# Altium PCB Export_PCB.PcbDoc (part 5 of 7)
Units mm, origin at the board's own origin, x right, y up, seen from the top; angles counter-clockwise.
Board outline 93 x 90 mm, 6 copper layers (Top_1, GND_2, SIGNAL_3, PWR_4, GND_5, Bottom_6), stack 1.606 mm thick; 470 components, 374 nets, 2145 pads, 1031 vias.
Unrouted connection lines stored in the file: 451.
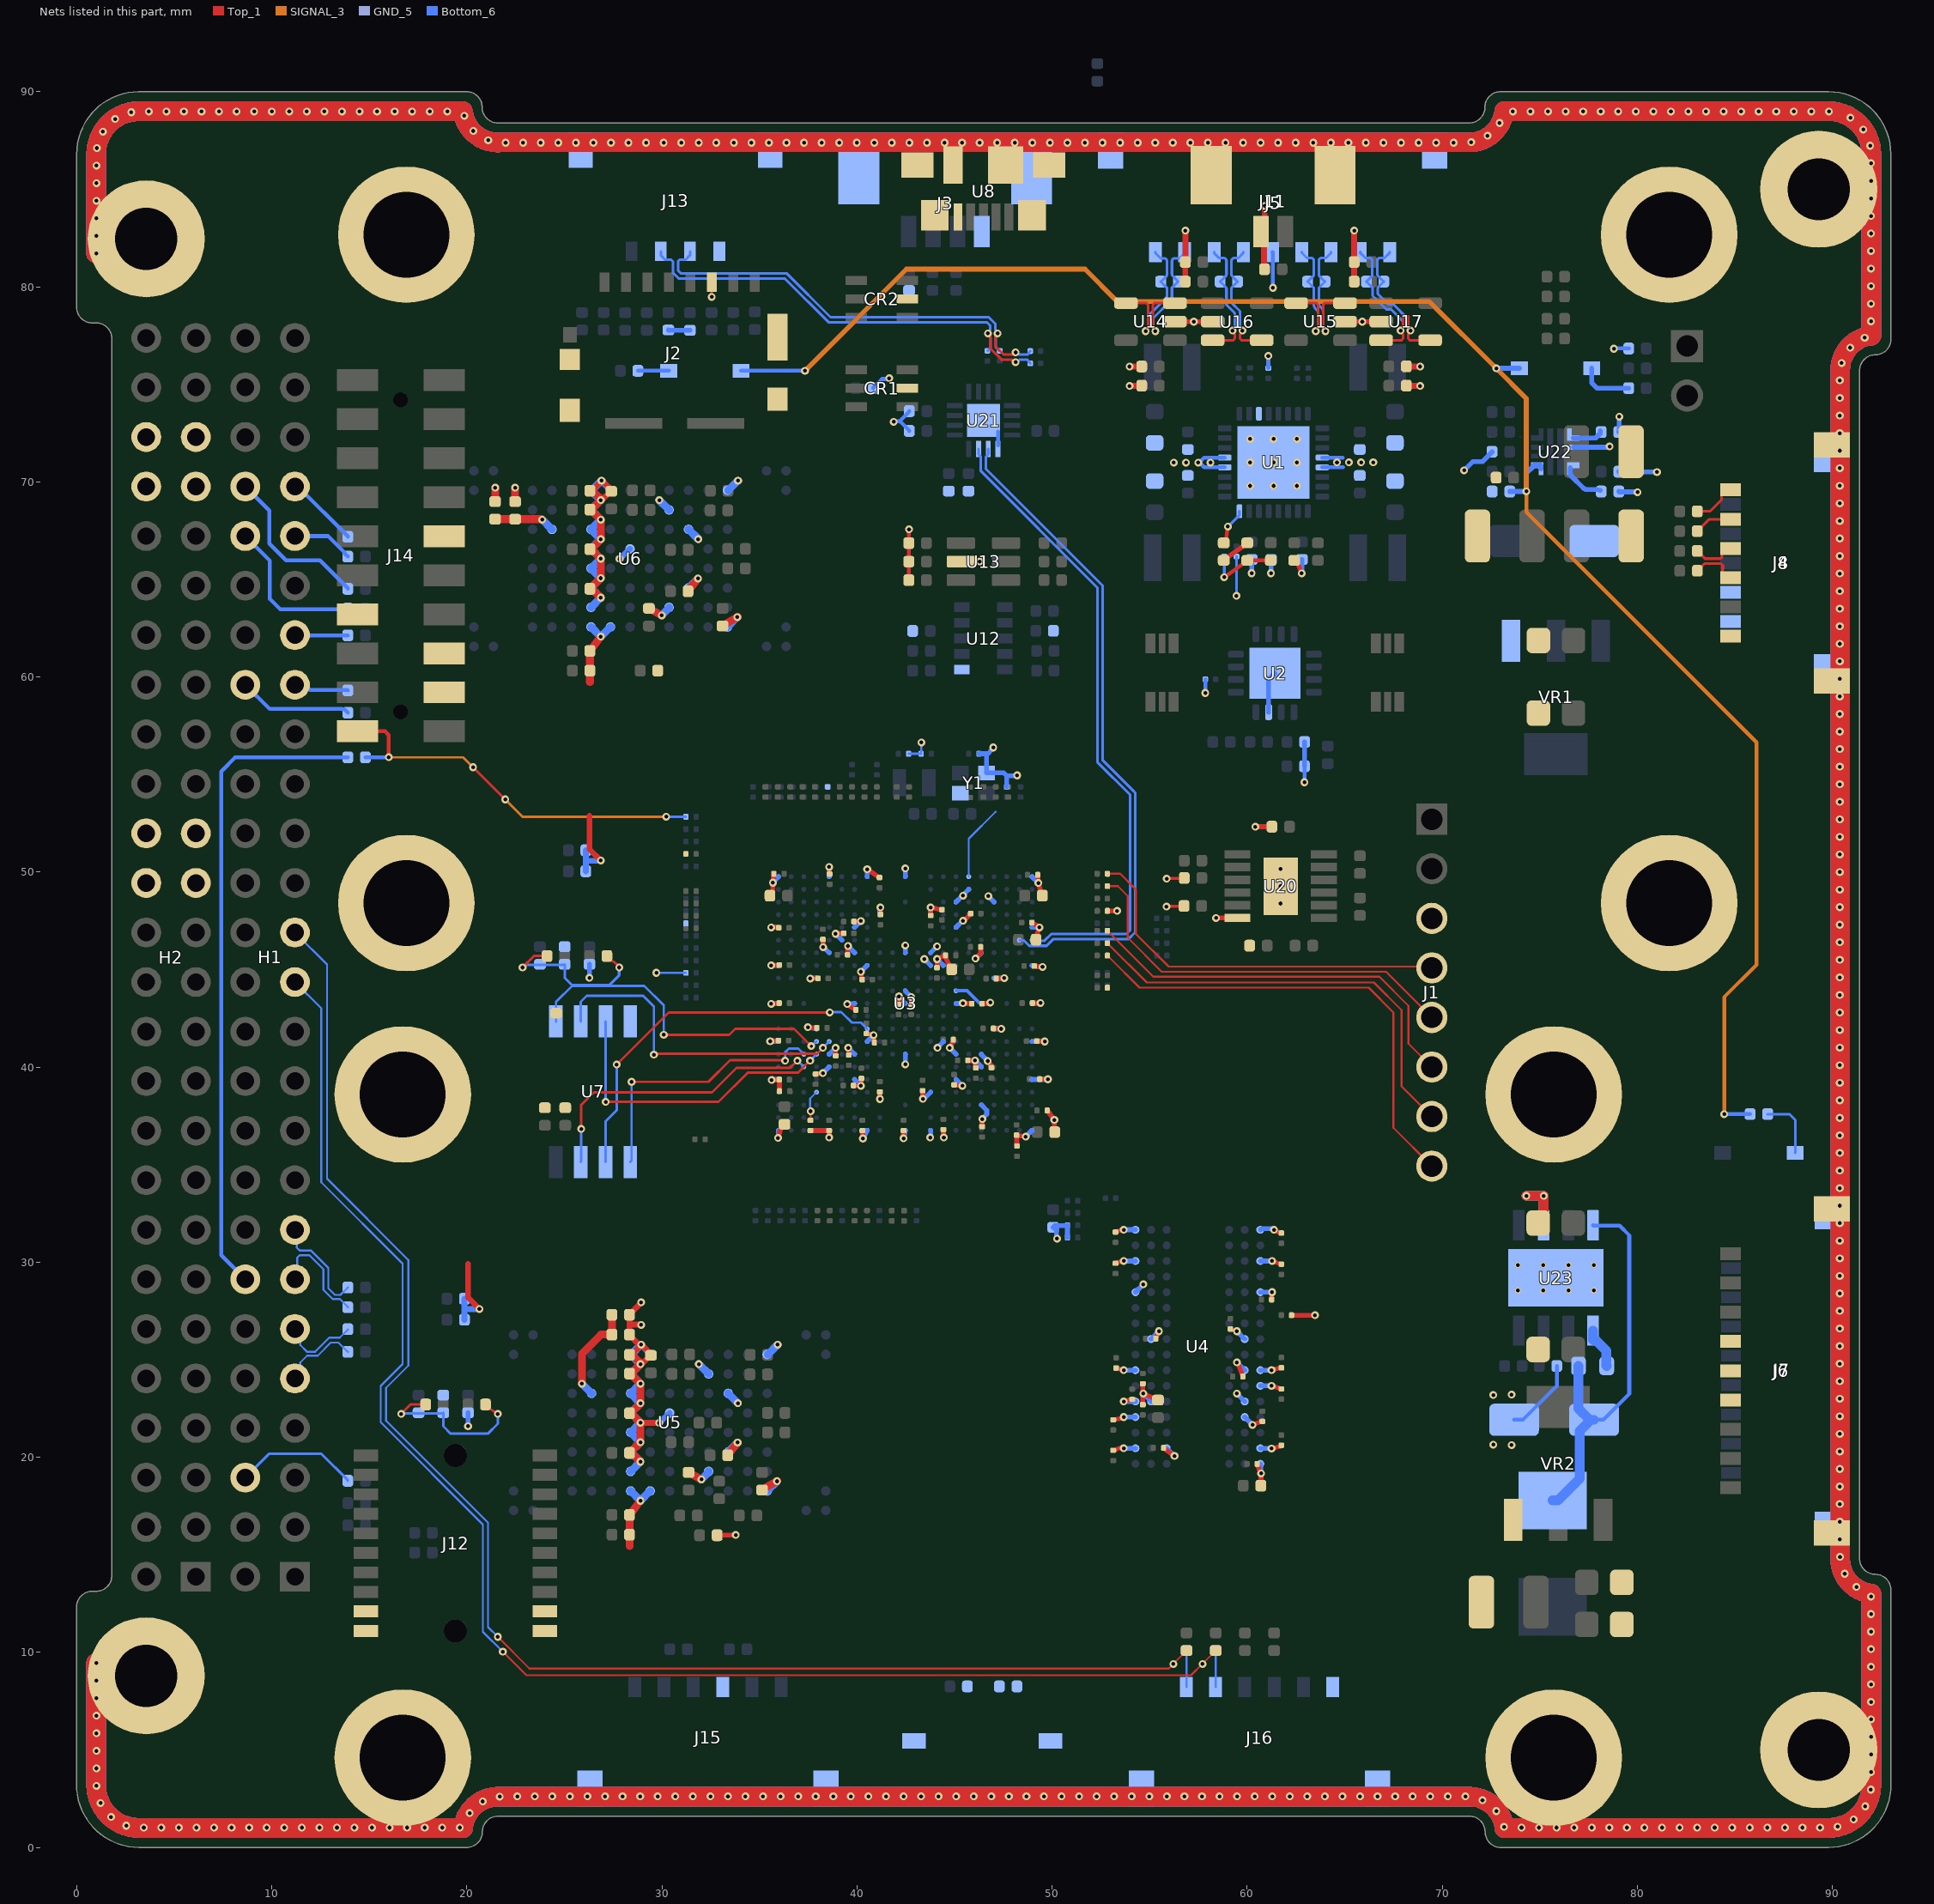
[diagram p7: the nets of this part, all layers, seen from the top]

## Via types
v1: diameter 0.4, hole 0.2, Top_1 to Bottom_6, 870 vias
v2: diameter 0.4, hole 0.2, Top_1 to Bottom_6, tented both sides, 160 vias
v3: diameter 0.4, hole 0.15, Top_1 to Bottom_6, 1 vias

## Nets (pads, with @x,y where several pads share a name; then routed paths per layer and width w, separated by ;. In a path a pad name is that pad's centre, name@x,y a point inside that pad or via, vN(x,y) a via of type N, cw(c..) or ccw(c..) an arc to the next point about the centre after c; other vN are vias at no path point) (continued)
GND: BT1.1 C1.1 C2.2 C3.1 C4.1 C5.2 C6.1 C7.1 C10.1 C11.2 C12.1 C13.2 C14.1 C15.1 C16.1 C17.1 C18.1 C19.1 C20.1 C21.1 C22.1 C23.1 C24.1 C25.1 C26.1 C27.1 C28.1 C29.2 C30.1 C31.1 C32.1 C33.1 C34.1 C35.1 C36.1 C37.1 C38.1 C39.1 C40.1 C41.1 C42.1 C43.1 C44.1 C45.1 C46.1 C47.1 C48.1 C49.1 C50.1 C51.1 C52.1 C53.1 C54.1 C55.1 C56.1 C57.1 C58.1 C59.1 C60.2 C61.2 C62.2 C63.2 C64.2 C65.2 C66.2 C67.2 C68.2 C69.2 C70.2 C71.2 C72.2 C73.2 C74.2 C75.2 C76.2 C77.2 C78.2 C79.2 C80.2 C81.2 C82.2 C83.2 C84.2 C85.1 C86.1 C87.1 C88.1 C89.1 C90.1 C91.1 C92.1 C93.1 C94.1 C95.1 C96.1 C97.1 C98.1 C99.1 C100.1 C102.1 C103.1 C104.2 C105.2 C106.1 C107.1 C108.1 C109.1 C110.1 C111.1 C112.1 C113.1 C114.1 C115.1 C116.1 C117.1 C118.1 C119.1 C120.1 C121.1 C122.1 C123.1 C124.1 C125.1 C126.1 C127.1 C128.1 C129.1 C130.1 C131.1 C132.1 C133.1 C134.1 C135.1 C136.1 C143.1 C144.1 C145.1 C146.1 C147.1 C148.1 C149.1 C150.1 C151.1 C153.1 C154.1 C155.1 C156.1 C158.1 C159.1 C160.1 C161.1 C162.1 C163.1 C164.1 C165.1 C166.1 C167.1 C168.1 C169.1 C170.1 C173.1 C174.1 C175.1 C176.2 C177.1 C178.1 C179.1 C180.1 C181.1 C182.1 c.1 CR1.2 CR2.2 D5.2 D7.2 H2.29 H2.30 H2.31 H2.32 H2.47 H2.48 H3.1 H4.1 H5.1 H6.1 H7.1 H8.1 H9.1 H10.1 Hole1.1 Hole2.1 Hole3.1 Hole4.1 J1.3 J2.G1 J2.G2 J2.G3 J2.G4 J2.P6 J3.4 J3.M1 J3.M2 J4.4 J4.5 J4.6 J5.2 J5.M1 J5.M2 J6.4 J6.5 J6.6 J6.M1 J6.M2 J7.M1 J7.M2 J8.1 J8.7 J11.5 J11.M1 J11.M2 J12.01 J12.02 J12.19 J12.20 J13.4 J13.M1 J13.M2 J14.10 J14.13 J14.16 J14.18 J15.3 J15.7 J16.1 J16.7 R11.2 R13.1 R20.2 R22.1 R23.1 R24.1 R25.1 R26.1 R27.2 R124.2 R128.2 R130.1 R131.1 R170.2 R171.2 R181.2 R187.2 R193.2 R196.1 R198.1 R199.1 R204.2 R205.2 R207.2 R208.2 R211.2 U1.3 U1.12 U1.13 U1.28 U1.29 U1.33 U2.3 U2.17 U3.A1 U3.A11 U3.A14 U3.A17 U3.A21 U3.AA1 U3.AA8 U3.AA9 U3.AA11 U3.AA14 U3.AA17 U3.AA21 U3.B6 U3.C4 U3.C7 U3.D9 U3.D13 U3.E1 U3.E7 U3.E15 U3.E21 U3.F16 U3.G5 U3.G9 U3.G11 U3.G15 U3.G17 U3.H1 U3.H8 U3.H9 U3.H14 U3.H21 U3.J4 U3.J18 U3.K11 U3.L1 U3.L7 U3.L11 U3.L15 U3.L21 U3.N4 U3.N18 U3.P1 U3.P8 U3.P14 U3.P21 U3.R5 U3.R7 U3.R11 U3.R15 U3.R17 U3.T5 U3.T17 U3.U1 U3.U7 U3.U15 U3.U21 U3.V9 U3.V13 U3.W5 U4.A9 U4.B1 U4.B3 U4.B9 U4.D1 U4.D8 U4.E1 U4.E2 U4.E8 U4.F9 U4.G1 U4.G8 U4.G9 U4.J2 U4.J8 U4.M1 U4.M9 U4.P1 U4.P9 U4.T1 U4.T9 U5.G2@28.4,25.273 U5.G3@28.4,24.273 U5.G4@28.4,23.273 U5.G5@28.4,22.273 U5.G6@28.4,21.273 U5.G7@28.4,20.273 U5.G8@28.4,19.273 U5.G9@28.4,18.273 U5.H2@29.4,25.273 U5.H9@29.4,18.273 U5.J5@30.4,22.273 U5.L3@32.4,24.273 U5.L8@32.4,19.273 U5.M4@33.4,23.273 U5.M7@33.4,20.273 U5.P2@35.4,25.273 U5.P9@35.4,18.273 U6.G2@26.368,69.564 U6.G3@26.368,68.564 U6.G4@26.368,67.564 U6.G5@26.368,66.564 U6.G6@26.368,65.564 U6.G7@26.368,64.564 U6.G8@26.368,63.564 U6.G9@26.368,62.564 U6.H2@27.368,69.564 U6.H9@27.368,62.564 U6.J5@28.368,66.564 U6.L3@30.368,68.564 U6.L8@30.368,63.564 U6.M4@31.368,67.564 U6.M7@31.368,64.564 U6.P2@33.368,69.564 U6.P9@33.368,62.564 U7.4 U8.5 U8.6 U8.7 U8.8 U8.9 U8.10 U8.11 U12.6 U13.2 U14.2 U15.2 U16.2 U17.2 U20.6 U20.13 U21.1 U21.17 U22.8 U23.6 U23.9 VR1.1 VR2.1 Y1.2 Y1.4 | length 1089.2
  Top_1 w0.125: v1(32.557,79.478) J2.P6@32.557,80.226
  Top_1 w0.15: v1(55.868,48.223) 55.886,48.241 56.749,48.241 C161.1@56.767,48.259 ; v1(55.88,49.657) 55.898,49.675 56.761,49.675 R196.1@56.779,49.692
  Top_1 w0.2: R170.2@42.661,64.958 42.667,64.963 42.667,67.559 v1(42.672,67.564) ; U13.2@45.327,65.913 45.328,65.914 v1(46.298,65.916) v1(46.298,65.916)
  Top_1 w0.25: C107.1@32.835,16.002 32.842,16.009 33.779,16.009 v1(33.786,16.017) ; C18.1@35.543,48.789 35.68,48.952 v1(35.693,49.453) C23.1@35.743,49.909 ; v1(35.554,41.324) 35.595,41.324 35.628,41.358 C51.1@35.976,41.358 ; v1(35.603,43.239) 35.626,43.262 C49.1@35.99,43.262 ; v1(35.603,45.212) 35.623,45.232 C42.1@36.018,45.233 ; v1(35.603,47.162) 35.968,47.162 C21.1@35.99,47.162 ; v1(35.959,36.367) 36.126,36.931 C40.1@36.288,37.068 ; C32.1@36.015,39.362 36.003,39.35 35.637,39.35 v1(35.625,39.338) 35.634,39.347 36.017,39.347 36.026,39.338 C28.1@36.026,38.766 ; v1@37.501,42.052 C27.1@37.931,41.999 ; v1@37.614,44.548 C25.1@38.002,44.548 ; R27.2@37.615,36.745 C45.1@38.574,36.745 ; C37.1@37.885,39.642 v1@38.239,39.697 ; v1@38.256,46.159 C22.1@38.256,46.545 ; v1(38.578,36.387) 38.576,36.389 38.576,36.74 C45.1@38.578,36.742 ; v1(38.578,50.262) 38.592,50.248 38.592,49.908 C44.1@38.606,49.895 C44.1@38.606,49.895 ; C58.1@38.903,40.589 v1(38.903,40.987) ; v1(38.903,46.837) 38.924,46.858 C36.1@39.318,46.858 ; v1(39.503,43.236) 39.515,43.19 R23.1@39.94,42.937 ; C20.1@39.518,45.758 39.518,46.184 v1(39.542,46.207) ; v1(39.553,40.987) cw(c39.331,40.872) 39.581,40.872 C30.1@39.581,40.62 ; C31.1@39.818,39.058 39.828,39.048 40.192,39.048 v1(40.203,39.037) 40.217,39.051 40.217,39.408 40.229,39.42 R24.1@40.231,39.42 ; C19.1@39.843,47.458 39.843,47.46 39.856,47.472 40.188,47.472 v1(40.203,47.487) ; v1(40.203,44.887) C33.1@40.265,44.487 ; C53.1@40.278,36.745 C53.1@40.278,36.745 40.293,36.733 40.293,36.356 v1(40.307,36.342) ; C26.1@40.486,41.713 40.838,41.658 v1(40.853,41.637) 40.838,41.616 C94.1@40.894,41.259 ; v1(40.528,50.142) 41.131,49.733 R26.1@41.156,49.72 ; v1(41.178,38.363) 41.176,38.365 41.176,38.723 C47.1@41.178,38.725 ; C41.1@41.206,47.82 v1@41.206,48.184 ; C92.1@42.153,43.199 42.142,43.21 42.142,43.613 v1(42.154,43.625) ; v1@42.388,36.352 C56.1@42.389,36.745 ; C95.1@42.775,43.228 42.778,43.231 42.778,43.596 v1(42.775,43.599) ; C87.1@43.363,38.795 43.374,38.784 43.374,38.385 v1(43.385,38.374) ; C46.1@43.778,47.799 v1(43.778,48.187) C59.1@44.302,48.069 ; v1(44.103,45.537) 44.468,45.712 44.49,45.672 C50.1@44.856,45.008 ; C39.1@44.106,45.095 v1@44.106,45.534 ; C90.1@44.431,36.795 44.431,36.41 v1(44.454,36.387) ; v1(44.753,40.987) 44.955,41.368 C96.1@44.943,41.408 ; C86.1@44.981,39.092 v1@45.39,39.028 ; v1(45.434,43.274) 45.446,43.263 R20.2@45.875,43.263 ; v1(45.435,47.504) 45.464,47.533 45.508,47.533 45.819,47.843 45.819,47.856 C54.1@45.831,47.868 ; C98.1@45.697,40.337 v1(46.053,40.337) C85.1@46.103,39.949 ; v1(46.075,45.568) 46.343,45.836 C38.1@46.343,46.158 ; C91.1@46.414,36.947 v1@46.414,37.32 ; v1@46.709,40.311 46.709,40.264 46.873,40.1 46.873,39.983 46.885,39.97 C88.1@46.898,39.97 ; C93.1@47.015,41.962 47.025,41.972 47.39,41.972 v1(47.401,41.961) ; C57.1@47.143,44.533 47.145,44.534 47.525,44.534 v1(47.553,44.562) ; R128.2@48.196,35.964 C89.1@48.196,36.504 ; C89.1@48.228,36.5 v1(48.654,36.437) ; C55.1@48.968,47.408 49.34,47.205 v1(49.353,47.162) 49.158,46.578 C52.1@49.181,46.533 ; C43.1@48.996,43.285 v1(49.413,43.285) ; C35.1@49.093,45.183 49.093,45.17 49.106,45.158 49.489,45.158 v1(49.514,45.132) ; C99.1@49.24,41.312 v1(49.628,41.312) ; C34.1@49.259,49.845 49.261,49.833 49.307,49.534 cw(c49.06,49.496) v1(49.303,49.437) 49.478,48.787 49.481,48.784 C24.1@49.481,48.783 ; C97.1@49.368,39.383 49.371,39.38 49.786,39.38 v1(49.788,39.378) ; C81.2@49.751,37.776 49.82,37.695 v1(50.121,37.291) 50.121,36.833 C100.1@50.136,36.671 ; C29.2@52.84,48.006 v1(53.34,48.006) ; C67.2@53.139,20.357 53.582,20.509 v1(53.678,20.462) ; C68.2@53.139,21.922 53.632,21.999 v1(53.678,22.062) ; C75.2@53.256,29.945 53.281,29.954 53.563,30.051 cw(c53.644,29.814) v1(53.678,30.062) ; C74.2@53.256,31.545 53.281,31.554 53.563,31.651 cw(c53.644,31.414) v1(53.678,31.662) ; C104.2@53.287,24.572 v1(53.678,24.462) ; v1(53.678,22.862) 53.712,22.845 C77.2@54.099,22.978 ; C72.2@54.647,22.704 54.647,23.19 54.678,23.221 v1(54.678,23.262) ; C66.2@54.654,23.768 54.654,23.286 v1(54.678,23.262) ; C76.2@55.318,26.083 55.331,26.108 v1(55.478,26.462) ; C64.2@55.431,22.933 55.438,22.933 55.443,22.938 v1(54.678,23.262) ; C79.2@55.74,20.462 v1(56.278,20.062) ; U14.2@56.302,78.211 v1(57.27,78.211) U16.2@58.237,78.211 ; v1(58.411,47.643) 58.414,47.647 59.502,47.647 U20.6@59.506,47.65 ; C3.1@58.801,65.971 58.963,66.109 59.845,66.734 R124.2@60.008,66.871 ; C80.2@59.153,26.581 v1(59.478,26.462) ; v1(59.478,24.862) 59.525,24.84 C69.2@59.784,24.139 ; v1@60.278,21.662 60.702,21.834 C78.2@60.784,21.838 ; v1@60.42,52.323 C162.1@61.272,52.324 ; C73.2@60.518,19.658 60.546,19.577 60.67,19.216 v1(60.715,19.173) v1(60.715,19.173) 60.71,19.169 60.71,18.61 C84.2@60.706,18.606 ; v1(61.251,20.449) 61.675,20.545 C82.2@61.756,20.614 ; v1(61.251,23.662) 61.731,23.519 C70.2@61.756,23.507 ; v1(61.251,24.462) 61.261,24.477 61.271,24.487 61.736,24.585 C83.2@61.761,24.59 ; C105.2@61.255,28.083 61.255,28.108 61.255,28.358 cw(c61.505,28.358) v1@61.278,28.461 ; v1@61.279,30.059 61.731,29.904 C71.2@61.756,29.895 ; v1(61.378,31.662) ccw(c61.568,31.824) 61.488,31.587 61.731,31.504 C65.2@61.756,31.495 ; R131.1@62.281,27.283 62.35,27.281 v1(63.477,27.281) ; R13.1@62.42,65.971 62.583,65.834 v1@62.8,65.313 ; U15.2@64.938,78.211 v1(65.906,78.211) U17.2@66.873,78.211
  Top_1 w0.3: 20.066,29.902 20.066,28.182 v1(20.647,27.601) ; 26.289,52.889 26.289,51.169 v1(26.87,50.588) ; C125.1@26.431,69.564 26.906,70.039 v2(26.906,70.064) 26.931,70.064 27.406,69.589 27.406,69.539 26.95,69.083 26.887,69.083 v2(26.868,69.064) ; C114.1@28.463,25.273 28.938,25.748 v2(28.938,25.773) ; v2(28.9,21.773) 28.906,21.767 29.857,21.767 v2(29.863,21.761) ; v2(28.9,24.773) 28.919,24.792 28.982,24.792 29.438,25.248 29.438,25.298 28.963,25.773 v2(28.938,25.773) ; v2(28.938,26.789) 28.93,26.797 28.341,26.797 ; v2(28.938,27.94) 28.938,27.927 28.341,27.33 C116.1@28.341,27.305 28.341,26.797 ; v1(53.975,74.912) 53.984,74.921 54.588,74.921 C133.1@54.597,74.93 ; v1(53.975,75.909) C147.1@54.597,75.909 ; C151.1@56.833,80.237 C148.1@56.833,81.263 ; C148.1@56.835,81.265 v1@56.835,82.876 ; C176.2@60.891,80.899 60.865,80.925 60.865,82.668 J5.2@60.708,82.825 60.901,83.018 v1@60.901,84.14 ; C153.1@65.487,80.237 C150.1@65.487,81.263 ; C150.1@65.488,81.265 v1@65.488,82.876 ; C146.1@68.248,74.93 68.257,74.921 68.861,74.921 v1(68.87,74.912) ; C149.1@68.248,75.909 v1(68.87,75.909) ; 28.341,26.797 C117.1@28.341,26.289 28.341,26.264 28.813,25.792 28.919,25.792 v2(28.938,25.773)
  Top_1 w0.4: C129.1@21.456,69.198 v2(21.456,69.699) ; C128.1@22.481,69.198 v2(22.481,69.699) ; 26.312,59.741 C121.1@26.312,61.337 26.387,61.437 v2(26.868,62.064) ; C125.1@26.406,69.564 26.431,69.564 26.821,69.174 26.821,69.111 v2(26.868,69.064) 26.368,68.564 v2(26.868,68.064) v2(26.868,67.064) 26.868,67.039 26.393,66.564 26.368,66.564 v2(26.868,66.064) v2(26.868,65.064) 26.368,64.564 v2(26.868,64.064) ; 28.344,15.45 C110.1@28.344,17.046 28.419,17.146 v2(28.9,17.773) ; C114.1@28.438,25.273 28.463,25.273 28.853,24.883 28.853,24.82 v2(28.9,24.773) 28.4,24.273 v2(28.9,23.773) v2(28.9,22.773) 28.9,22.748 28.425,22.273 28.4,22.273 v2(28.9,21.773) v2(28.9,20.773) 28.4,20.273 v2(28.9,19.773) ; C124.1@29.337,63.514 v2(29.994,63.152) ; C122.1@31.342,64.393 31.417,64.493 v2(31.849,65.046) ; C115.1@31.369,19.223 v2(32.026,18.861) ; C181.1@33.106,62.614 33.206,62.689 v2(33.868,63.064) v2@33.881,63.077 ; C182.1@33.374,20.102 33.449,20.202 v2(33.881,20.755) ; C109.1@35.138,18.323 35.238,18.398 v2(35.9,18.773) v2@35.913,18.786
  Top_1 w0.5: v1(74.316,33.401) v1(75.205,33.401) 75.205,32.29 C173.1@74.919,32.004
  Top_1 w1: v1@1,3.2 ccw(c3.2,3.2) 3.2,1 19.811,1 cw(c21.6,0.8) v1@21.561,2.6 ; v1@1,3.213 Hole1.1@1,9.453 ; Hole2.1@1,81.709 1,86.8 cw(c3.2,86.8) 3.163,89 ; 3.175,89 19.8,89 ccw(c21.589,89.2) 21.561,87.4 ; v1@21.59,2.6 50.975,2.6 71.399,2.6 ; 21.59,87.399 42.015,87.4 v1@71.399,87.4 ; 71.429,2.6 cw(c71.4,0.8) 73.189,1 89.8,1 ccw(c89.8,3.2) 92,3.2 92,13.011 cw(c92.2,14.8) v1@90.4,14.795 ; v1@71.429,87.4 ccw(c71.389,89.2) 73.178,89 v1@89.789,89 ; v1@89.815,89 cw(c89.8,86.8) 92,86.806 92,77.496 ccw(c92.2,75.707) 90.4,75.707 ; v1@90.4,14.8 90.4,75.702
  GND_5 w1: v1@1,3.2 ccw(c3.2,3.2) 3.2,1 19.811,1 cw(c21.6,0.8) v1@21.561,2.6 ; v1@1,3.213 v1@1,9.453 ; v1@1,81.709 1,86.8 cw(c3.2,86.8) 3.163,89 ; 3.175,89 19.8,89 ccw(c21.589,89.2) 21.561,87.4 ; v1@21.59,2.6 50.975,2.6 71.399,2.6 ; 21.59,87.399 42.015,87.4 v1@71.399,87.4 ; 71.429,2.6 cw(c71.4,0.8) 73.189,1 89.8,1 ccw(c89.8,3.2) 92,3.2 92,13.011 cw(c92.2,14.8) v1@90.4,14.795 ; v1@71.429,87.4 ccw(c71.389,89.2) 73.178,89 v1@89.789,89 ; v1@89.815,89 cw(c89.8,86.8) 92,86.806 92,77.496 ccw(c92.2,75.707) 90.4,75.707 ; v1@90.4,14.8 90.4,75.702
  Bottom_6 w0.127: C62.2@42.651,56.062 C63.2@43.288,56.062 43.298,56.071 43.298,56.633 v1(43.307,56.642)
  Bottom_6 w0.2: C131.1@40.836,74.803 40.836,74.824 41.285,75.273 41.618,75.273 v1(41.656,75.311) ; v1(41.885,73.076) 41.923,73.114 42.197,73.114 ; R199.1@42.682,72.609 42.682,72.629 42.197,73.114 ; R198.1@42.682,73.625 42.682,73.6 42.197,73.114 ; U21.1@47.235,71.87 U21.17@47.235,72.577 ; v2(57.496,70.99) v2@57.55,70.99 ; v1(57.86,59.177) v1(57.86,59.177) R11.2@57.862,59.88 R11.2@57.862,59.88 ; U1.28@58.856,70.743 57.796,70.743 v2@57.55,70.99 ; U1.29@58.856,71.243 57.803,71.243 v2@57.55,70.99 ; C14.1@61.087,75.827 v1(61.087,76.454) ; J11.5@61.306,81.78 61.321,81.765 v1(61.321,79.945) ; v1(62.939,54.603) C7.1@62.939,55.423 ; U1.13@63.856,70.743 64.915,70.743 ; U1.12@63.856,71.243 64.908,71.243 ; D7.2@73.686,21.92 74.136,21.92 75.874,23.657 R211.2@75.874,24.681 ; v1(78.801,76.821) 78.815,76.835 R208.2@79.56,76.835 R208.2@79.574,76.849
  Bottom_6 w0.25: v1(20.066,21.59) R181.2@20.066,22.283 ; v1(26.289,44.577) R187.2@26.289,45.27 ; C130.1@30.335,77.782 30.342,77.775 31.435,77.775 C132.1@31.442,77.768 ; v1@35.566,41.312 U3.P21@35.978,41.312 ; v1(35.603,43.239) 35.626,43.262 U3.L21@35.978,43.262 ; v1(35.603,45.212) U3.H21@35.978,45.212 ; v1(35.603,47.162) U3.E21@35.978,47.162 ; v1(35.625,39.338) 35.649,39.362 U3.U21@35.978,39.362 ; v1(35.693,49.453) 35.693,49.477 U3.A21@35.978,49.762 ; v1(35.959,36.367) 35.969,36.376 35.969,36.753 U3.AA21@35.978,36.762 ; v1(37.488,42.042) U3.N18@37.928,41.962 ; v1(37.603,44.537) 37.628,44.562 U3.J18@37.928,44.562 ; v1(38.253,39.687) U3.T17@38.578,40.012 ; v1(38.266,46.149) 38.291,46.149 U3.G17@38.578,45.862 ; v1(38.578,36.387) U3.AA17@38.578,36.762 ; U3.R17@38.578,40.662 v1(38.903,40.987) ; U3.A17@38.578,49.762 v1(38.578,50.262) ; v1(38.903,46.837) U3.F16@39.228,46.512 ; v1(39.503,43.236) 39.516,43.249 39.865,43.249 U3.L15@39.878,43.262 ; v1(39.542,46.207) 39.542,46.203 39.878,45.867 U3.G15@39.878,45.862 ; v1(39.553,40.987) U3.R15@39.878,40.662 ; U3.U15@39.878,39.362 v1(40.203,39.037) ; U3.E15@39.878,47.162 v1(40.203,47.487) ; v1(40.203,44.887) U3.H14@40.528,45.212 ; v1(40.307,36.342) U3.AA14@40.528,36.762 ; U3.P14@40.528,41.312 v1(40.853,41.637) ; U3.A14@40.528,49.762 v1(40.528,50.142) ; v1(41.178,38.363) U3.V13@41.178,38.712 ; U3.D13@41.178,47.812 41.178,48.161 v1(41.203,48.186) ; v1(42.154,43.625) 42.154,43.584 v1@42.229,43.509 ; v1@42.229,43.508 U3.L11@42.475,43.262 ; v1@42.405,36.347 U3.AA11@42.478,36.762 ; v1(42.478,40.137) U3.R11@42.478,40.662 ; U3.K11@42.478,43.912 42.478,43.904 42.775,43.607 v1(42.775,43.599) ; U3.G11@42.478,45.862 v1(42.478,46.237) ; U3.A11@42.478,49.762 v1(42.478,50.187) ; v1(43.385,38.374) 43.425,38.374 43.5,38.449 43.515,38.449 U3.V9@43.778,38.712 ; v1(43.453,45.537) U3.H9@43.778,45.212 ; v1(43.752,36.387) 43.778,36.413 U3.AA9@43.778,36.762 ; U3.G9@43.778,45.862 v1(44.103,46.187) ; U3.D9@43.778,47.812 v1(43.778,48.187) ; v1(44.103,45.537) U3.H8@44.428,45.212 ; v1(44.129,40.99) 44.129,41.001 44.428,41.3 U3.P8@44.428,41.312 ; U3.AA8@44.428,36.762 44.428,36.413 v1(44.454,36.387) ; v1(44.753,40.987) U3.R7@45.078,40.662 ; U3.U7@45.078,39.362 v1(45.403,39.037) ; U3.L7@45.078,43.262 45.421,43.262 v1(45.434,43.274) ; U3.E7@45.078,47.162 45.42,47.504 v1(45.435,47.504) ; U3.C7@45.078,48.462 v1@45.403,48.787 ; v1(45.435,48.787) v1@45.403,48.787 ; U3.B6@45.728,49.112 v1@45.403,48.787 ; v1(46.053,40.337) U3.T5@46.378,40.012 ; v1(46.075,45.568) 46.084,45.568 U3.G5@46.378,45.862 ; C61.2@46.259,56.068 46.71,56.068 ; U3.W5@46.378,38.062 46.652,37.788 46.652,37.581 46.429,37.359 v1(46.429,37.336) ; U3.R5@46.378,40.662 46.378,40.649 46.703,40.324 v1(46.703,40.311) ; v1(46.736,48.768) 46.736,48.754 U3.C4@47.028,48.462 ; v1(46.987,56.385) 46.987,56.344 46.648,56.005 Y1.4@46.648,55.082 47.53,55.082 47.676,54.935 ; U3.N4@47.028,41.962 v1(47.401,41.961) ; U3.J4@47.028,44.562 v1(47.553,44.562) ; C60.2@47.676,54.364 47.676,54.935 ; v1(48.212,54.955) 48.191,54.935 47.676,54.935 ; v1(48.654,36.437) U3.AA1@48.978,36.762 ; U3.U1@48.978,39.362 49.773,39.362 v1(49.788,39.378) ; U3.P1@48.978,41.312 v1(49.628,41.312) ; U3.L1@48.978,43.262 48.99,43.274 49.401,43.274 v1(49.413,43.285) ; U3.H1@48.978,45.212 v1(49.514,45.132) ; U3.E1@48.978,47.162 v1(49.353,47.162) ; U3.A1@48.978,49.762 v1(49.303,49.437) ; v1(50.258,31.211) 50.258,31.251 50.226,31.283 50.226,31.64 50.077,31.789 C102.1@50.059,31.789 50.14,31.87 50.777,31.87 R130.1@50.789,31.882 ; C103.1@50.789,31.265 R130.1@50.789,31.882 ; R130.1@50.789,31.895 R130.1@50.789,31.882 ; v1(53.678,20.462) U4.B1@54.278,20.462 ; v1(53.678,22.062) U4.D1@54.278,22.062 ; v1(53.678,22.862) U4.E1@54.278,22.862 ; v1(53.678,24.462) U4.G1@54.278,24.462 ; v1(53.678,30.062) U4.P1@54.278,30.062 ; v1(53.678,31.662) U4.T1@54.278,31.662 ; U4.M1@54.278,28.462 v1(54.678,28.862) ; v1(54.678,23.262) U4.E2@55.078,22.862 ; U4.J2@55.078,26.062 v1(55.478,26.462) ; U4.B3@55.878,20.462 v1(56.278,20.062) ; v1(59.478,23.262) U4.E8@59.878,22.862 ; v1(59.478,24.862) U4.G8@59.878,24.462 ; v1(59.478,26.462) U4.J8@59.878,26.062 ; U4.D8@59.878,22.062 v1(60.278,21.662) ; v1(60.233,65.317) 60.238,65.322 C17.1@60.238,66.022 C17.1@60.243,66.027 ; U4.A9@60.678,19.662 60.696,19.644 60.696,19.192 v1(60.715,19.173) ; U4.B9@60.678,20.462 60.685,20.455 61.239,20.455 v1@61.245,20.449 ; U4.F9@60.678,23.662 v1@61.103,23.662 ; U4.G9@60.678,24.462 v1@61.103,24.462 ; U4.M9@60.678,28.462 v1(61.278,28.462) ; U4.P9@60.678,30.062 v1(61.278,30.062) ; U4.T9@60.678,31.662 60.708,31.692 60.819,31.692 60.853,31.727 61.273,31.727 61.337,31.662 v1(61.378,31.662) ; U2.3@61.102,58.192 61.102,59.867 U2.17@61.427,60.192 ; v1(61.223,65.317) 61.229,65.322 C15.1@61.229,66.022 C15.1@61.234,66.027 ; v1(62.8,65.312) 62.805,65.317 62.805,66.017 C16.1@62.811,66.022 ; C7.1@62.939,55.423 62.944,55.428 62.944,56.663 C6.1@62.949,56.668 ; v1(71.123,70.588) 71.577,71.042 72.076,71.042 72.554,71.52 R204.2@72.554,71.545 ; U22.8@76.745,71.77 78.5,71.77 78.541,71.811 v2(78.582,71.811) ; C169.1@79.054,69.505 79.072,69.487 79.992,69.487 v1(80.01,69.469) ; R207.2@79.054,70.521 79.072,70.503 v1(81.008,70.503) ; C170.1@79.054,72.553 79.066,72.566 79.066,73.328 v1(79.079,73.341)
  Bottom_6 w0.3: C154.1@19.881,27.051 19.881,27.588 ; C155.1@19.881,28.125 19.881,27.588 ; v1(20.647,27.601) 20.635,27.588 19.881,27.588 ; c.1@26.104,50.038 26.104,50.575 ; C158.1@26.104,51.112 26.104,50.575 ; v1(26.87,50.588) 26.858,50.575 26.104,50.575 ; v2(26.906,70.064) 26.906,70.045 27.368,69.583 U6.H2@27.368,69.564 ; v2(27.831,66.052) 27.844,66.052 28.356,66.564 U6.J5@28.368,66.564 ; v2(28.938,25.773) 28.938,25.754 29.4,25.292 U5.H2@29.4,25.273 ; v2(29.863,21.761) 29.876,21.761 30.388,22.273 U5.J5@30.4,22.273
  Bottom_6 w0.4: U6.G9@26.368,62.564 v2(26.868,62.064) U6.H9@27.368,62.564 ; U6.G8@26.368,63.564 v2(26.868,64.064) U6.G7@26.368,64.564 v2(26.868,65.064) U6.G6@26.368,65.564 v2(26.868,66.064) U6.G5@26.368,66.564 v2(26.868,67.064) U6.G4@26.368,67.564 v2(26.868,68.064) U6.G3@26.368,68.564 v2(26.868,69.064) U6.G2@26.368,69.564 ; U6.G2@26.406,69.564 v2(26.906,70.064) ; U5.G9@28.4,18.273 v2(28.9,17.773) U5.H9@29.4,18.273 ; U5.G8@28.4,19.273 v2(28.9,19.773) U5.G7@28.4,20.273 v2(28.9,20.773) U5.G6@28.4,21.273 v2(28.9,21.773) U5.G5@28.4,22.273 v2(28.9,22.773) U5.G4@28.4,23.273 v2(28.9,23.773) U5.G3@28.4,24.273 v2(28.9,24.773) U5.G2@28.4,25.273 ; U5.G2@28.438,25.273 v2(28.938,25.773) ; v2(29.868,69.064) U6.L3@30.368,68.564 ; v2(29.994,63.152) 29.994,63.165 30.368,63.54 U6.L8@30.368,63.564 ; U6.M7@31.368,64.564 v2@31.849,65.045 ; U6.M4@31.368,67.564 v2(31.868,67.064) ; v2(31.9,24.773) U5.L3@32.4,24.273 ; v2(32.026,18.861) 32.026,18.874 32.4,19.249 U5.L8@32.4,19.273 ; U6.P9@33.368,62.564 v2(33.868,63.064) ; U5.M7@33.4,20.273 v2(33.881,20.755) ; U5.M4@33.4,23.273 v2(33.9,22.773) ; U6.P2@33.406,69.564 v2(33.906,70.064) ; U5.P9@35.4,18.273 v2(35.9,18.773) ; U5.P2@35.438,25.273 v2(35.938,25.773)
  Bottom_6 w0.5: v1(74.316,33.401) v1(75.205,33.401) 75.194,33.391 U23.6@75.194,31.895
  Bottom_6 w1: v1@1,3.2 ccw(c3.2,3.2) 3.2,1 19.811,1 cw(c21.6,0.8) v1@21.561,2.6 ; v1@1,3.213 Hole1.1@1,9.453 ; Hole2.1@1,81.709 1,86.8 cw(c3.2,86.8) 3.163,89 ; 3.175,89 19.8,89 ccw(c21.589,89.2) 21.561,87.4 ; v1@21.59,2.6 50.975,2.6 71.399,2.6 ; 21.59,87.399 42.015,87.4 v1@71.399,87.4 ; 71.429,2.6 cw(c71.4,0.8) 73.189,1 89.8,1 ccw(c89.8,3.2) 92,3.2 92,13.011 cw(c92.2,14.8) v1@90.4,14.795 ; v1@71.429,87.4 ccw(c71.389,89.2) 73.178,89 v1@89.789,89 ; v1@89.815,89 cw(c89.8,86.8) 92,86.806 92,77.496 ccw(c92.2,75.707) 90.4,75.707 ; v1@90.4,14.8 90.4,75.702
  other v1: 3.443,1.017 4.343,1.017 5.243,1.017 6.143,1.017 7.043,1.017 7.943,1.017 8.843,1.017 9.743,1.017 10.643,1.017 11.543,1.017 12.443,1.017 13.343,1.017 14.243,1.017 15.143,1.017 16.043,1.017 16.943,1.017 17.843,1.017 18.743,1.017 19.643,1.017 74.069,1.017 74.969,1.017 75.869,1.017 76.769,1.017 77.669,1.017 78.569,1.017 79.469,1.017 80.369,1.017 81.269,1.017 82.169,1.017 83.069,1.017 83.969,1.017 84.869,1.017 85.769,1.017 86.669,1.017 87.569,1.017 88.469,1.017 89.369,1.017 73.169,1.055 90.267,1.07 2.548,1.114 91.09,1.435 1.765,1.558 20.15,1.761 72.772,1.862 91.687,2.108 1.223,2.276 20.822,2.359 72.065,2.42 21.687,2.607 22.587,2.617 23.487,2.617 24.387,2.617 25.287,2.617 26.187,2.617 27.087,2.617 27.987,2.617 28.887,2.617 29.787,2.617 30.687,2.617 31.587,2.617 32.487,2.617 33.387,2.617 34.287,2.617 35.187,2.617 36.087,2.617 36.987,2.617 37.887,2.617 38.787,2.617 39.687,2.617 40.587,2.617 41.487,2.617 42.387,2.617 43.287,2.617 44.187,2.617 45.087,2.617 45.987,2.617 46.887,2.617 47.787,2.617 48.687,2.617 49.587,2.617 50.487,2.617 51.387,2.617 52.287,2.617 53.187,2.617 54.087,2.617 54.987,2.617 55.887,2.617 56.787,2.617 57.687,2.617 58.587,2.617 59.487,2.617 60.387,2.617 61.287,2.617 62.187,2.617 63.087,2.617 63.987,2.617 64.887,2.617 65.787,2.617 66.687,2.617 67.587,2.617 68.487,2.617 69.387,2.617 70.287,2.617 71.187,2.617 91.968,2.963 1.017,3.153 91.983,3.863 1.017,4.053 91.983,4.763 1.017,4.953 91.983,5.663 1.017,5.853 91.983,6.563 1.017,6.753 91.983,7.463 1.017,7.653 91.983,8.363 1.017,8.553 91.983,9.263 1.017,9.453 91.983,10.163 91.983,11.063 91.983,11.963 91.983,12.863 91.23,13.356 90.636,14.032 90.392,14.898 90.383,15.798 90.383,16.698 90.383,17.598 90.383,18.498 90.383,19.398 90.383,20.298 73.558,20.625 72.619,20.65 90.383,21.198 90.383,22.098 90.383,22.998 72.619,23.189 73.558,23.214 90.383,23.898 90.383,24.798 90.383,25.698 90.383,26.598 90.383,27.498 90.383,28.398 90.383,29.298 90.383,30.198 90.383,31.098 90.383,31.998 90.383,32.898 90.383,33.798 90.383,34.698 90.383,35.598 42.394,36.347 90.383,36.498 90.383,37.398 90.383,38.298 90.383,39.198 90.383,40.098 90.383,40.998 90.383,41.898 90.383,42.798 90.383,43.698 90.383,44.598 90.383,45.498 90.383,46.398 90.383,47.298 90.383,48.198 61.722,48.387 90.383,49.098 61.722,49.276 90.383,49.998 61.722,50.165 90.383,50.898 90.383,51.798 60.419,52.322 90.383,52.698 90.383,53.598 90.383,54.498 90.383,55.398 90.383,56.298 90.383,57.198 90.383,58.098 90.383,58.998 90.383,59.898 90.383,60.798 90.383,61.698 90.383,62.598 90.383,63.498 90.383,64.398 90.383,65.298 90.383,66.198 90.383,67.098 90.383,67.998 90.383,68.898 90.383,69.798 90.383,70.698 90.383,71.598 90.383,72.498 90.383,73.398 90.383,74.298 90.383,75.198 90.477,76.093 90.918,76.877 91.657,77.391 91.983,78.23 91.983,79.13 91.983,80.03 91.983,80.93 1.017,81.709 91.983,81.83 1.017,82.609 91.983,82.73 56.838,82.879 65.492,82.879 1.017,83.509 91.983,83.63 60.896,84.145 1.017,84.409 91.983,84.53 1.017,85.309 91.983,85.43 1.017,86.209 91.983,86.33 1.037,87.108 91.939,87.229 21.99,87.382 22.89,87.382 23.79,87.382 24.69,87.382 25.59,87.382 26.49,87.382 27.39,87.382 28.29,87.382 29.19,87.382 30.09,87.382 30.99,87.382 31.89,87.382 32.79,87.382 33.69,87.382 34.59,87.382 35.49,87.382 36.39,87.383 37.29,87.383 38.19,87.383 39.09,87.383 39.99,87.383 40.89,87.383 41.79,87.383 42.69,87.383 43.59,87.383 44.49,87.383 45.39,87.383 46.29,87.383 47.19,87.383 48.09,87.383 48.99,87.383 49.89,87.383 50.79,87.383 51.69,87.383 52.59,87.383 53.49,87.383 54.39,87.383 55.29,87.383 56.19,87.383 57.09,87.383 57.99,87.383 58.89,87.383 59.79,87.383 60.69,87.383 61.59,87.383 62.49,87.383 63.39,87.383 64.29,87.383 65.19,87.383 66.09,87.383 66.99,87.383 67.89,87.383 68.79,87.383 69.69,87.383 70.59,87.383 71.49,87.411 21.099,87.508 72.328,87.739 1.35,87.953 20.339,87.989 91.587,88.057 72.941,88.398 1.971,88.604 90.925,88.667 19.874,88.76 2.803,88.947 3.702,88.983 4.602,88.983 5.502,88.983 6.402,88.983 7.302,88.983 8.202,88.983 9.102,88.983 10.002,88.983 10.902,88.983 11.802,88.983 12.702,88.983 13.602,88.983 14.502,88.983 15.402,88.983 16.302,88.983 17.202,88.983 18.102,88.983 19.002,88.983 73.625,88.983 74.525,88.983 75.425,88.983 76.325,88.983 77.225,88.983 78.125,88.983 79.025,88.983 79.925,88.983 80.825,88.983 81.725,88.983 82.625,88.983 83.525,88.983 84.425,88.983 85.325,88.983 86.225,88.983 87.125,88.983 88.025,88.983 88.925,88.983 89.825,88.985
  other v2: 60.156,69.793 61.356,69.793 62.556,69.793 56.246,70.99 56.871,70.99 58.121,70.99 60.156,70.993 61.356,70.993 62.556,70.993 64.607,70.997 65.216,70.997 65.841,70.997 66.466,70.997 60.156,72.193 61.356,72.193 62.556,72.193
GOM_VBAT: H2.45 H2.46
HHSRTUNE: R20.1 U3.K7 | length 2.5
  Top_1 w0.25: R20.1@46.412,43.251 46.42,43.258 46.748,43.258 46.795,43.305 v1(46.836,43.305)
  Bottom_6 w0.175: U3.K7@45.082,43.916 45.642,43.916 46.286,43.272 46.803,43.272 v1(46.836,43.305)
HPM_MCP16502: R2.1 R69.2 R122.2 R124.1 | length 5.2
  Top_1 w0.127: R124.1@59.845,65.834 R124.1@60.008,65.971 R124.1@60.17,65.971 ; R122.2@61.051,65.971 R122.2@61.214,65.971
  Top_1 w0.2: v1(58.829,65.113) R124.1@59.845,65.834 ; R124.1@60.17,65.971 R122.2@61.051,65.971
  Bottom_6 w0.1: v1(29.718,44.831) R69.2@31.234,44.831
  Bottom_6 w0.15: v1(58.829,65.113) R2.1@58.829,66.178
IF_2_SW_USB_N: U3.F1 U21.3 | length 33.1
  Bottom_6 w0.134: U21.3@46.232,71.682 46.232,71.397 46.351,71.278 46.351,70.552 52.324,64.579 52.324,55.638 54.009,53.953 54.009,47.024 53.811,46.826 49.962,46.826 49.616,46.481 49.091,46.481 49.082,46.49 49,46.49 U3.F1@48.978,46.512
IF_2_SW_USB_P: U3.F2 U21.2 | length 34.3
  Bottom_6 w0.134: U21.2@46.732,71.682 46.732,71.397 46.613,71.278 46.613,70.66 52.585,64.687 52.585,55.746 54.193,54.138 54.27,54.061 54.27,46.915 53.919,46.565 50.07,46.565 49.725,46.22 48.833,46.22 48.563,46.49 48.35,46.49 U3.F2@48.328,46.512
IF_USB_CONN_N: J13.2 R114.2 R236.2 | length 23.6
  Top_1 w0.134: v1(46.713,77.609) 46.713,77.537 46.825,77.425 46.825,76.86 47.429,76.256 47.942,76.256 48.011,76.187 ccw(c48.133,76.31) v1(48.133,76.136)
  Bottom_6 w0.134: J13.2@29.946,81.814 29.946,81.614 30.179,81.381 30.487,81.381 30.565,81.302 30.565,81.191 30.565,80.731 30.881,80.415 36.31,80.415 36.391,80.333 38.542,78.183 46.65,78.183 46.837,77.996 46.837,77.805 46.763,77.732 v1@46.763,77.677 ; R114.2@46.697,76.716 46.846,76.866 46.846,77.404 46.713,77.537 v1(46.713,77.609) ; v1(48.133,76.136) 48.205,76.136 48.325,76.256 48.737,76.256 48.817,76.176 48.817,76.142 R236.2@48.887,76.073
IF_USB_CONN_P: J13.3 R115.2 R237.2 | length 23.4
  Top_1 w0.134: v1@47.125,77.449 47.125,77.521 cw(c47.213,77.521) v1(47.213,77.609) 47.213,77.537 47.086,77.411 47.086,76.968 47.537,76.517 47.942,76.517 48.011,76.585 cw(c48.133,76.463) v1(48.133,76.636)
  Bottom_6 w0.134: J13.3@31.446,81.814 31.446,81.614 31.213,81.381 30.905,81.381 30.826,81.302 30.826,81.083 30.826,80.839 30.989,80.676 36.418,80.676 38.65,78.444 46.758,78.444 47.098,78.105 47.098,77.796 47.162,77.732 47.162,77.486 47.107,77.432 47.107,76.917 47.244,76.781 R115.2@47.244,76.716 ; v1(48.133,76.636) 48.205,76.636 48.325,76.517 48.733,76.517 48.817,76.601 48.817,76.639 R237.2@48.887,76.708
JTAG_NTRST_PC22: J1.6 R101.2 | length 20.7
  Top_1 w0.1: R101.2@52.84,46.99 52.84,46.988 52.927,46.902 52.929,46.902 55.196,44.635 66.78,44.635 68.272,43.143 68.272,41.202 J1.6@69.469,40.005
JTAG_TCK_PC23: J1.5 R102.2 | length 20.7
  Top_1 w0.1: R102.2@52.84,49.276 53.376,49.276 53.876,48.776 53.876,46.633 55.625,44.885 67.129,44.885 J1.5@69.469,42.545
JTAG_TDI_PC25: J1.4 R104.2 | length 20
  Top_1 w0.1: R104.2@52.84,49.911 53.493,49.911 54.294,49.11 54.294,46.839 55.978,45.155 69.399,45.155 J1.4@69.469,45.085
JTAG_TDO_PC26: J1.7 R105.2 | length 22.6
  Top_1 w0.1: R105.2@52.84,46.355 52.84,46.353 52.927,46.267 52.929,46.267 54.861,44.334 66.505,44.334 67.922,42.917 67.922,39.012 J1.7@69.469,37.465
JTAG_TMS_PC24: J1.8 R103.2 | length 24.6
  Top_1 w0.1: R103.2@52.84,45.72 52.84,45.718 52.938,45.62 52.94,45.62 54.488,44.072 66.23,44.072 67.502,42.801 67.502,36.892 J1.8@69.469,34.925
LPM: R1.1 U3.A6 | length 5.9
  Bottom_6 w0.1: U3.A6@45.728,49.762 45.728,51.712 47.102,53.086
  Bottom_6 w0.127: v1(59.456,64.155) R1.1@59.456,66.175
LVDS_RXC_N: J11.9 R175.2 U17.4 | length 7.9
  Top_1 w0.134: 68.259,78.473 68.259,78.364 68.252,78.358 68.252,77.945 68.371,77.826 68.371,77.682 68.259,77.569 68.259,77.339 68.337,77.261 U17.4@69.383,77.261
  Bottom_6 w0.134: J11.9@67.306,81.78 67.306,81.736 67.043,81.473 66.81,81.473 ccw(c66.81,81.339) 66.676,81.339 66.676,80.649 ccw(c66.81,80.649) 66.715,80.555 66.876,80.394 R175.2@67.014,80.264 66.876,80.134 66.73,79.989 ccw(c66.826,79.894) 66.691,79.894 66.691,79.65 67.242,79.099 67.494,79.099 68.252,78.342 68.252,77.945 68.371,77.826 v1(68.371,77.754)
LVDS_RXC_P: J11.8 R175.1 U17.3 | length 7.9
  Top_1 w0.134: U17.3@66.873,77.261 67.919,77.261 67.998,77.339 67.998,77.556 67.871,77.682 67.871,77.826 67.991,77.945 67.991,78.466 67.998,78.473
  Bottom_6 w0.134: J11.8@65.806,81.78 65.806,81.736 66.069,81.473 66.281,81.473 cw(c66.281,81.339) 66.415,81.339 66.415,80.613 cw(c66.281,80.613) 66.376,80.519 66.251,80.394 R175.1@66.114,80.264 66.251,80.134 66.392,79.994 cw(c66.296,79.9) 66.43,79.9 66.43,79.541 67.134,78.838 67.386,78.838 67.991,78.233 67.991,77.945 67.871,77.826 v1(67.871,77.754)
LVDS_RXD_N: J11.4 R174.2 U16.4 | length 6.5
  Top_1 w0.134: v1(59.764,77.751) 59.764,77.679 59.635,77.55 59.635,77.339 59.714,77.261 U16.4@60.747,77.261
  Bottom_6 w0.134: v1(59.764,77.751) 59.764,77.823 59.635,77.953 59.635,78.751 59.204,79.182 59.204,79.904 cw(c59.338,79.904) 59.242,79.998 59.379,80.134 R174.2@59.516,80.264 59.379,80.394 59.241,80.531 cw(c59.337,80.625) 59.203,80.625 59.203,81.336 cw(c59.337,81.336) 59.337,81.47 59.543,81.47 59.806,81.733 J11.4@59.806,81.78
LVDS_RXD_P: J11.3 R174.1 U16.3 | length 6.3
  Top_1 w0.134: U16.3@58.237,77.261 59.295,77.261 59.374,77.339 59.374,77.568
  Bottom_6 w0.134: J11.3@58.306,81.78 58.306,81.733 58.569,81.47 58.807,81.47 cw(c58.807,81.336) 58.942,81.336 58.942,80.637 cw(c58.807,80.637) 58.903,80.543 58.754,80.394 R174.1@58.616,80.264 58.754,80.134 58.904,79.984 cw(c58.808,79.89) 58.942,79.89 58.942,79.074 59.374,78.643 59.374,77.942 59.259,77.827 v1(59.259,77.755)
LVDS_TXC_N: J11.7 R173.2 U15.3 | length 7.2
  Top_1 w0.134: 63.898,77.915 63.898,79.082 63.977,79.161 U15.3@65.023,79.161
  Bottom_6 w0.134: v1(64.018,77.724) 64.018,77.796 63.898,77.915 63.898,78.672 ccw(c63.503,78.672) 63.784,78.95 63.719,79.016 cw(c63.814,79.11) 63.68,79.11 63.68,79.952 63.991,80.264 R173.2@63.999,80.264 63.862,80.394 63.719,80.536 cw(c63.814,80.63) 63.68,80.63 63.68,81.339 cw(c63.814,81.339) 63.814,81.474 64.043,81.474 64.306,81.737 J11.7@64.306,81.78
LVDS_TXC_P: J11.6 R173.1 U15.4 | length 7.2
  Top_1 w0.134: U15.4@62.513,79.161 63.559,79.161 63.637,79.082 63.637,77.915
  Bottom_6 w0.134: J11.6@62.806,81.78 62.806,81.737 63.069,81.474 63.285,81.474 cw(c63.285,81.339) 63.419,81.339 63.419,80.632 cw(c63.285,80.632) 63.38,80.537 63.237,80.394 R173.1@63.099,80.264 63.107,80.264 63.418,79.952 63.418,79.11 ccw(c63.814,79.11) 63.533,78.832 63.598,78.766 cw(c63.503,78.672) 63.637,78.672 63.637,77.915 63.518,77.796 v1(63.518,77.724)
LVDS_TXD_N: J11.2 R172.2 U14.3 | length 7.5
  Top_1 w0.134: 55.178,77.915 55.178,79.082 55.256,79.161 U14.3@56.302,79.161
  Bottom_6 w0.134: v1(55.297,77.724) 55.297,77.796 55.178,77.915 55.178,78.327 cw(c55.312,78.327) 55.217,78.421 56.033,79.238 ccw(c55.753,79.516) 56.148,79.516 56.148,79.952 56.459,80.264 R172.2@56.467,80.264 ; R172.2@56.471,80.267 56.33,80.408 56.187,80.551 cw(c56.282,80.646) 56.148,80.646 56.148,81.322 cw(c56.282,81.322) 56.282,81.457 56.543,81.457 56.806,81.72 J11.2@56.806,81.78
LVDS_TXD_P: J11.1 R172.1 U14.4 | length 7.4
  Top_1 w0.134: U14.4@53.792,79.161 54.838,79.161 54.917,79.082 54.917,77.915
  Bottom_6 w0.134: v1(54.797,77.724) 54.797,77.796 54.917,77.915 54.917,78.327 cw(c55.312,78.327) 55.031,78.605 55.848,79.422 ccw(c55.753,79.516) 55.887,79.516 55.887,79.952 55.575,80.264 R172.1@55.567,80.264 ; J11.1@55.306,81.78 55.306,81.72 55.569,81.457 55.753,81.457 cw(c55.753,81.322) 55.887,81.322 55.887,80.617 cw(c55.753,80.617) 55.848,80.522 55.706,80.38 cw(c55.612,80.476) 55.705,80.379 R172.1@55.582,80.264
MIPI_REXT: R27.1 U3.V18 | length 1.5
  Top_1 w0.1: R27.1@37.603,37.349 37.613,37.349 37.62,37.356 37.62,37.732 v1(37.625,37.737)
  Bottom_6 w0.1: v1(37.625,37.737) 37.603,37.759 37.603,38.387 U3.V18@37.928,38.712
MISO_EXP_CONNECTOR: J16.6 R243.2 | length 1.9
  Bottom_6 w0.1: J16.6@56.885,8.217 56.896,8.228 R243.2@56.896,10.091
MISO_EXP_PC104: H1.27 R223.2 | length 77.7
  Top_1 w0.1: v1(21.59,10.795) 23.216,9.169 55.98,9.169 v1(56.218,9.407) 56.218,9.413 R223.2@56.896,10.091 R223.2@56.915,10.091
  Bottom_6 w0.1: H1.27@11.19,46.9 12.833,45.257 12.833,34.286 17.011,30.108 17.011,24.7 15.864,23.553 15.864,21.869 21.088,16.645 21.088,11.297 v1(21.59,10.795)
MOSI_EXP_CONNECTOR: J16.5 R242.2 | length 1.9
  Bottom_6 w0.1: J16.5@58.385,8.217 58.393,8.224 R242.2@58.393,10.091
MOSI_EXP_PC104: H1.25 R222.2 | length 77.3
  Top_1 w0.1: v1(21.845,10.034) 23.057,8.823 57.131,8.823 v1(57.715,9.407) 57.715,9.413 R222.2@58.393,10.091 R222.2@58.411,10.091
  Bottom_6 w0.1: H1.25@11.19,44.36 12.535,43.015 12.535,34.101 16.711,29.926 16.711,24.78 15.585,23.654 15.585,21.793 20.826,16.552 20.826,11.054 v1(21.845,10.034)
MRAM_QSPI_CLK: U3.N14 U7.6 | length 19.5
  Top_1 w0.125: v1(27.686,40.132) 30.353,42.799 v1(38.608,42.799)
  Bottom_6 w0.125: U7.6@27.113,35.137 27.113,37.223 27.686,37.796 v1(27.686,40.132) ; v1(38.608,42.799) 38.63,42.821 39.201,42.821 39.742,42.281 40.209,42.281 U3.N14@40.528,41.962
MRAM_QSPI_CS: R157.2 U3.P18 U7.1 | length 17.2
  Top_1 w0.125: v1(30.099,41.656) 33.452,41.656 33.762,41.966 36.776,41.966 v3(37.663,41.079)
  Bottom_6 w0.125: U7.1@24.573,42.337 24.573,43.346 25.396,44.169 29.098,44.169 30.099,43.168 v1(30.099,41.656) ; v3(37.663,41.079) 37.679,41.079 37.912,41.312 U3.P18@37.928,41.312
MRAM_QSPI_D0: U3.R19 U7.5 | length 14
  Top_1 w0.125: v1(28.448,39.243) 32.385,39.243 33.496,40.354 v1@36.322,40.354
  Bottom_6 w0.125: U7.5@28.383,35.137 28.448,35.202 v1(28.448,39.243) ; v1@36.322,40.354 36.322,40.763 36.509,40.949 36.991,40.949 U3.R19@37.278,40.662
  other v1: 36.322,40.329
MRAM_QSPI_D1: U3.P17 U7.2 | length 16.8
  Top_1 w0.125: v1(29.591,40.64) 29.642,40.691 37.957,40.691 v1(38.253,40.987)
  Bottom_6 w0.125: U7.2@25.843,42.337 25.843,43.346 26.153,43.656 29.039,43.656 29.591,43.104 v1(29.591,40.64) ; v1(38.253,40.987) U3.P17@38.578,41.312
MRAM_QSPI_D2: U3.R18 U7.3 | length 15.9
  Top_1 w0.125: v1(27.119,38.218) 27.121,38.215 32.906,38.215 34.41,39.719 36.985,39.719 37.595,40.329 v1(37.6,40.329)
  Bottom_6 w0.125: U7.3@27.113,42.337 27.119,42.331 v1(27.119,38.218) ; v1(37.6,40.329) v1(37.6,40.329) 37.928,40.66 U3.R18@37.928,40.662
MRAM_QSPI_D3: U3.T19 U7.7 | length 15.4
  Top_1 w0.125: v1(25.864,36.833) 25.864,38.056 26.517,38.709 32.575,38.709 33.821,39.955 36.567,39.955 v1@36.949,40.337
  Bottom_6 w0.125: U7.7@25.843,35.137 25.864,35.158 v1(25.864,36.833) ; v1@36.949,40.337 36.951,40.337 U3.T19@37.278,40.012 U3.T19@37.278,40.012
  other v1: 36.949,40.329
NetBT1_2: BT1.2 C160.2 R188.1
NetC3_2: C3.2 U1.24 | length 1.9
  Top_1 w0.2: C3.2@58.801,66.871 58.922,67.009 v1(59.012,67.712)
  Bottom_6 w0.15: v1(59.012,67.712) 59.024,67.712 59.606,68.293 U1.24@59.606,68.493
NetC116_2: C116.2 C117.2 U5.E4@26.4,23.273 | length 5.3
  Top_1 w0.4: v2@25.877,23.796 v2(25.9,23.773) 25.9,25.301 26.888,26.289 C117.2@27.441,26.289 ; C117.2@27.441,26.264 C116.2@27.441,27.305
  Bottom_6 w0.4: v2(25.9,23.773) U5.E4@26.4,23.273
NetC128_2: C128.2 C129.2 U6.E4@24.368,67.564 | length 3.1
  Top_1 w0.4: C129.2@21.454,68.087 23.845,68.087 v2(23.868,68.064)
  Bottom_6 w0.4: v2(23.868,68.064) U6.E4@24.368,67.564
NetC156_2: C156.2 R178.2 R179.1 R180.1 | length 8.8
  Top_1 w0.134: v1(16.637,22.225) 17.12,22.708 R180.1@17.896,22.708 ; R178.2@20.96,22.708 21.098,22.545 21.188,22.487 21.332,22.393 21.384,22.359 v1(21.59,22.225)
  Bottom_6 w0.134: v1(16.637,22.225) 16.666,22.254 18.767,22.254 C156.2@18.796,22.283 18.796,22.146 18.796,21.59 19.177,21.209 21.076,21.209 21.59,21.723 v1(21.59,22.225)
NetC159_2: C159.2 R184.2 R185.1 R186.1 | length 8.9
  Top_1 w0.134: v1(22.86,45.107) 22.86,45.116 23.439,45.695 R186.1@24.119,45.695 ; R184.2@27.183,45.695 27.321,45.532 27.411,45.474 27.555,45.38 27.607,45.346 27.813,45.212 v1(27.813,45.107)
  Bottom_6 w0.134: v1(22.86,45.107) 22.932,45.107 23.066,45.241 24.99,45.241 C159.2@25.019,45.27 25.019,45.133 25.019,44.577 25.4,44.196 27.299,44.196 27.81,44.706 27.81,45.104 v1(27.813,45.107)
NetC169_2: C169.2 U22.10 | length 2.2
  Bottom_6 w0.254: U22.10@76.56,70.717 76.56,70.464 ccw(c76.814,70.464) 76.634,70.285 77.239,69.679 ccw(c77.418,69.859) 77.418,69.605 77.93,69.605 C169.2@78.105,69.562
NetC170_2: C170.2 U22.7 | length 1.6
  Bottom_6 w0.254: U22.7@76.72,72.247 77.867,72.247 78.105,72.485 C170.2@78.105,72.61
NetC171_1: C171.1 D7.1 L5.1 U23.8 | length 20.9
  Bottom_6 w0.2: U23.8@77.734,31.895 77.762,31.867 79.1,31.867 79.591,31.377 79.591,23.252 78.258,21.92 D7.1@77.786,21.92
  Bottom_6 w0.5: L5.1@75.653,17.787 75.928,17.787 77.045,18.903 77.045,21.345 D7.1@77.62,21.92 ; C171.1@76.984,24.681 76.984,22.495 77.559,21.92 D7.1@77.62,21.92 ; D7.1@77.786,21.92 D7.1@77.62,21.92
NetC171_2: C171.2 U23.1 | length 2.2
  Bottom_6 w0.5: U23.1@77.734,26.495 77.734,26.02 77.784,25.97 77.903,25.97 78.413,25.461 78.413,24.703 C171.2@78.434,24.681
NetD1_1: 
NetD2_1: 
NetD2_2: R111.2
NetD3_1: 
NetD3_2: R113.2
NetD4_2: 
NetD6_1: D6.1 D13.1 R205.1 R214.2 U22.1 | length 92.8
  SIGNAL_3 w0.2: v2(74.314,69.509) 74.314,68.434 86.106,56.642 86.106,45.239 84.455,43.588 v1(84.455,37.592)
  SIGNAL_3 w0.254: v1(37.338,75.692) 42.545,80.899 51.689,80.899 53.34,79.248 69.342,79.248 v1(72.771,75.819) 74.314,74.276 v2(74.314,69.509)
  Bottom_6 w0.2: D13.1@34.061,75.692 v1(37.338,75.692) ; v1(84.455,37.592) R214.2@85.783,37.592
  Bottom_6 w0.254: v1(72.771,75.819) D6.1@73.956,75.819 ; R205.1@73.466,69.505 73.467,69.507 v2@74.313,69.507 ; v2(74.314,69.509) 74.314,70.44 74.674,70.799 74.674,70.822 74.697,70.845 75.047,70.845 75.07,70.822 75.072,70.82 U22.1@75.072,70.67
NetD6_2: D6.2 R49.2 | length 2.8
  Bottom_6 w0.254: D6.2@77.664,75.819 77.664,75.079 77.94,74.803 R49.2@79.56,74.803
NetD8_2: 
NetD9_2: 
NetD10_2: 
NetD11_1: D11.1 R214.1 | length 3.2
  Bottom_6 w0.134: R214.1@86.683,37.592 87.796,37.592 88.107,37.28 88.107,35.618 D11.1@88.087,35.598
NetD12_1: 
NetD13_2: D13.2 R232.2 | length 1.6
  Bottom_6 w0.2: R232.2@28.771,75.692 D13.2@30.353,75.692
NetH1_06: H1.06 R215.1 | length 6.3
  Bottom_6 w0.134: H1.06@8.65,18.96 9.862,20.172 12.55,20.172 13.901,18.821 R215.1@13.901,18.796
NetH1_09: H1.09 R216.2 | length 4
  Bottom_6 w0.1: H1.09@11.19,24.04 11.464,24.314 11.464,24.857 11.818,25.211 12.361,25.211 13.025,25.875 13.426,25.875 R216.2@13.901,25.4
NetH1_11: H1.11 R217.2 | length 4
  Bottom_6 w0.1: H1.11@11.19,26.58 11.458,26.313 11.458,25.753 11.8,25.411 12.23,25.411 12.949,26.131 13.491,26.131 13.901,26.54 R217.2@13.901,26.565
NetH1_13: H1.13 R218.2 | length 5.5
  Bottom_6 w0.1: H1.13@11.19,29.12 11.303,29.233 11.303,30.226 11.43,30.353 11.938,30.353 12.653,29.638 12.653,28.581 13.128,28.107 13.5,28.107 13.901,27.706 R218.2@13.901,27.686
NetH1_14: H1.14 R227.1 | length 33.3
  Bottom_6 w0.2: H1.14@8.65,29.12 7.407,30.363 7.407,55.159 8.128,55.88 R227.1@13.901,55.88
NetH1_15: H1.15 R219.2 | length 5.3
  Bottom_6 w0.1: H1.15@11.19,31.66 11.292,31.558 11.292,30.745 11.433,30.604 11.999,30.604 12.9,29.703 12.9,28.664 13.241,28.324 13.525,28.324 13.901,28.7 R219.2@13.901,28.702
NetH1_37: H1.37 R224.2 | length 2.8
  Bottom_6 w0.2: H1.37@11.19,59.6 11.444,59.346 11.963,59.346 11.972,59.336 13.874,59.336 R224.2@13.901,59.309
NetH1_38: H1.38 R225.1 | length 5.8
  Bottom_6 w0.2: H1.38@8.65,59.6 9.896,58.354 13.609,58.354 13.62,58.343 13.729,58.343 13.901,58.171 R225.1@13.901,58.166
NetH1_39: H1.39 R226.2 | length 2.7
  Bottom_6 w0.2: H1.39@11.19,62.14 11.194,62.136 13.897,62.136 R226.2@13.901,62.131
NetH1_43: H1.43 R228.2 | length 3.2
  Bottom_6 w0.2: H1.43@11.19,67.22 12.899,67.22 13.759,66.361 13.759,66.309 R228.2@13.901,66.167
NetH1_44: H1.44 R229.1 | length 8
  Bottom_6 w0.2: H1.44@8.65,67.22 9.909,65.961 9.909,64.003 10.44,63.472 13.873,63.472 R229.1@13.901,63.5
NetH1_45: H1.45 R230.2 | length 3.8
  Bottom_6 w0.2: H1.45@11.19,69.76 11.342,69.76 13.901,67.201 R230.2@13.901,67.183
NetH1_46: H1.46 R231.1 | length 8.4
  Bottom_6 w0.2: H1.46@8.65,69.76 9.878,68.532 9.878,66.83 10.738,65.97 12.472,65.97 13.901,64.541 R231.1@13.901,64.516
NetJ8_3: J8.3 R53.2 | length 2.4
  Top_1 w0.134: R53.2@83.079,65.44 83.449,65.811 84.296,65.811 84.375,65.732 84.375,65.324 84.613,65.087 J8.3@84.783,65.087
NetJ8_4: J8.4 R75.2 | length 2.2
  Top_1 w0.134: R75.2@83.079,66.456 83.471,66.064 84.261,66.064 84.349,66.153 84.349,66.324 84.613,66.587 J8.4@84.783,66.587
NetJ8_5: J8.5 R77.2 | length 2
  Top_1 w0.134: R77.2@83.079,67.474 83.692,68.087 J8.5@84.783,68.087
NetJ8_6: J8.6 R109.2 | length 2.3
  Top_1 w0.134: R109.2@83.079,68.488 83.728,68.488 84.329,69.089 84.329,69.324 84.592,69.587 J8.6@84.783,69.587
NetJ14_19: J14.19 R81.2 R227.2 | length 20.5
  Top_1 w0.127: v1(20.32,55.372) v1(21.971,53.721)
  Top_1 w0.2: J14.19@14.393,57.21 15.815,57.21 16.002,57.023 v1(16.002,55.88)
  SIGNAL_3 w0.127: v1(16.002,55.88) 19.812,55.88 v1(20.32,55.372) ; v1(21.971,53.721) 22.86,52.832 v1(30.226,52.832)
  Bottom_6 w0.127: v1(30.226,52.832) R81.2@31.234,52.832
  Bottom_6 w0.2: R227.2@14.801,55.88 v1(16.002,55.88)